# Altium PCB JP_acc.PcbDoc
Units mm, origin at the board's own origin, x right, y up, seen from the top; angles counter-clockwise.
Board outline 27.2 x 23 mm, 2 copper layers (Top Layer, Bottom Layer), stack 1.58 mm thick; 39 components, 26 nets, 160 pads, 19 vias.
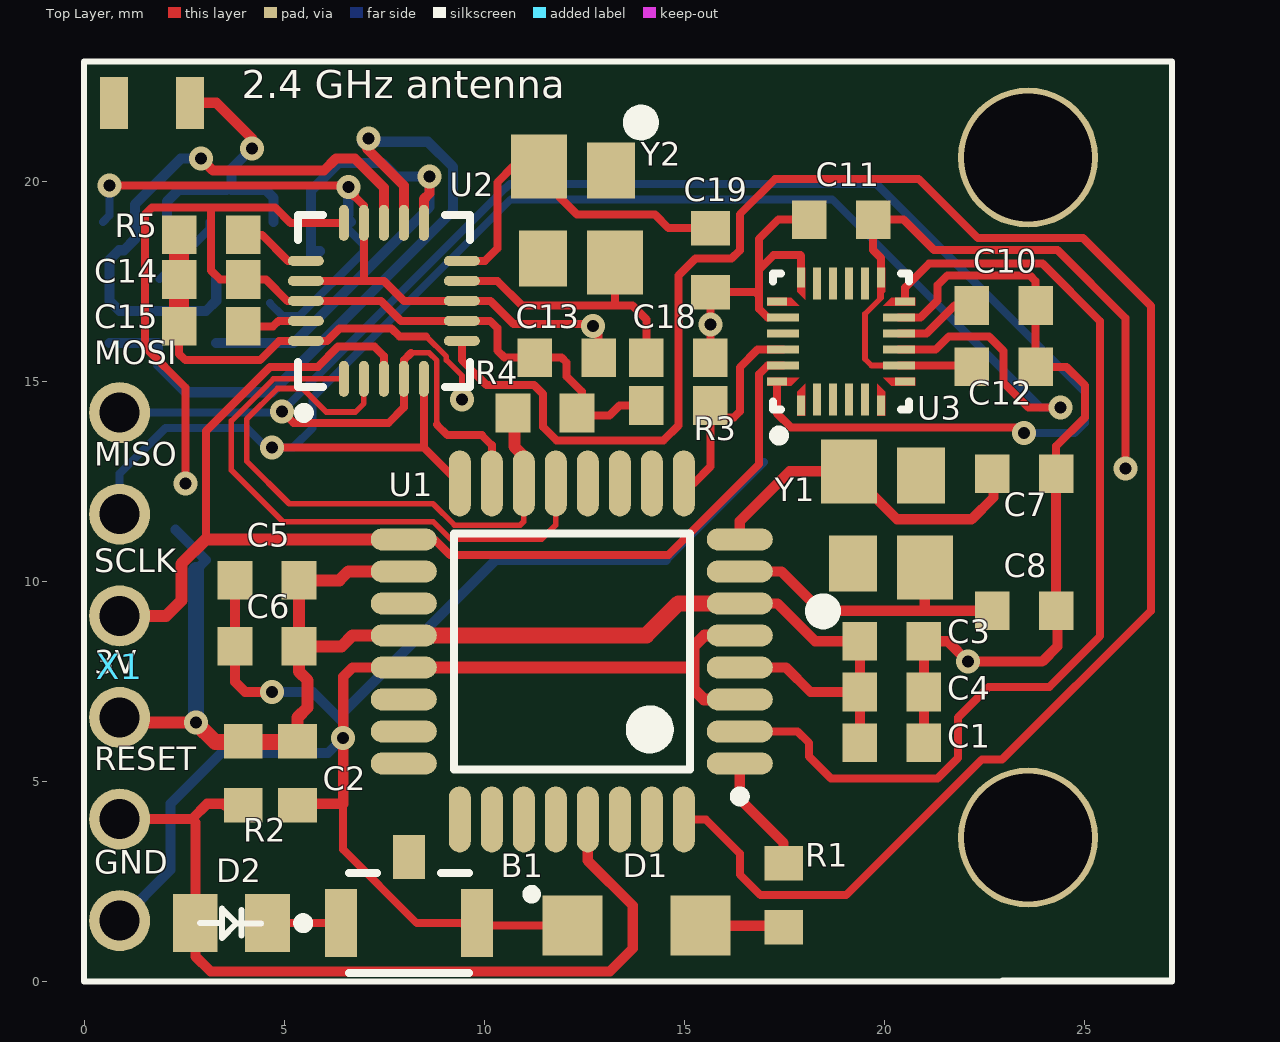
[diagram p0: Top Layer view]
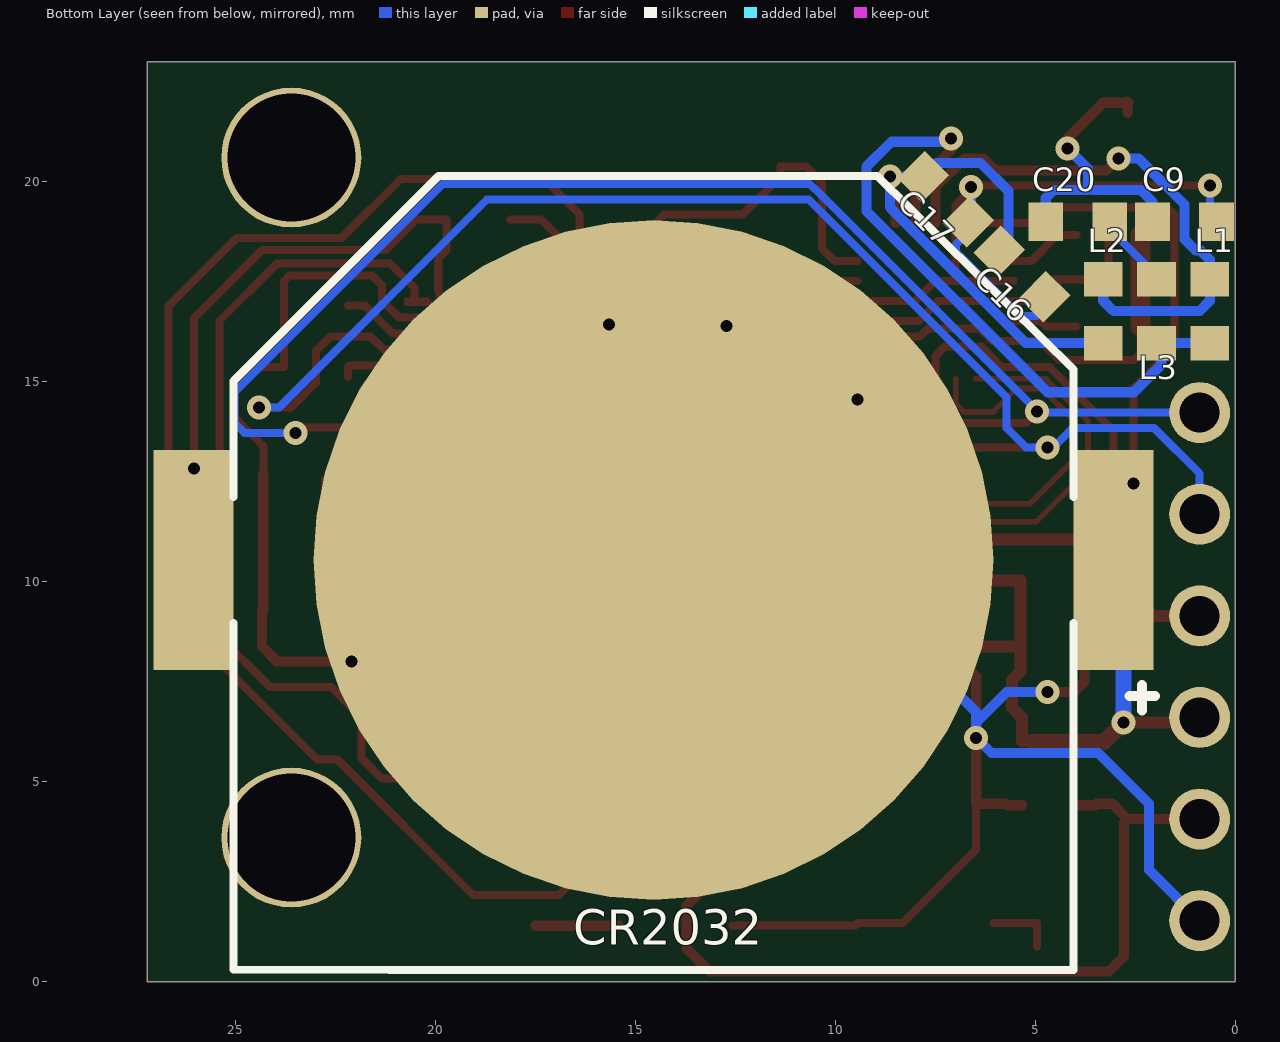
[diagram p1: Bottom Layer view, seen from below]
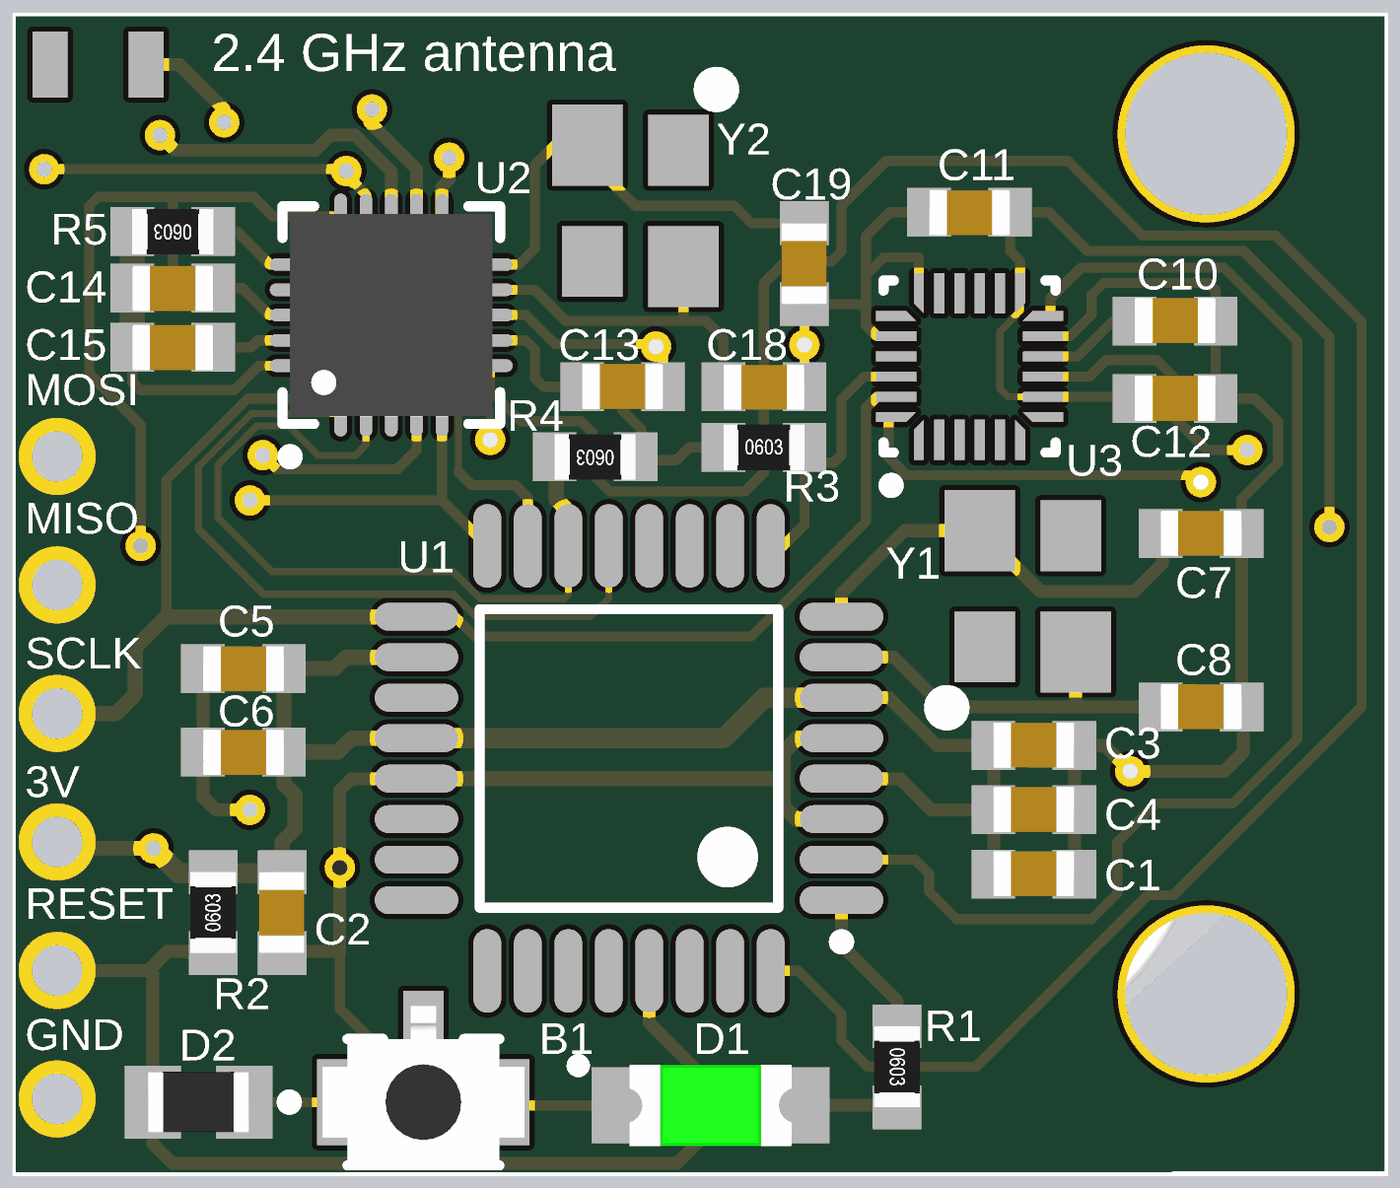
[diagram p2: 3D render of the assembled board from above, using the file's embedded part models]
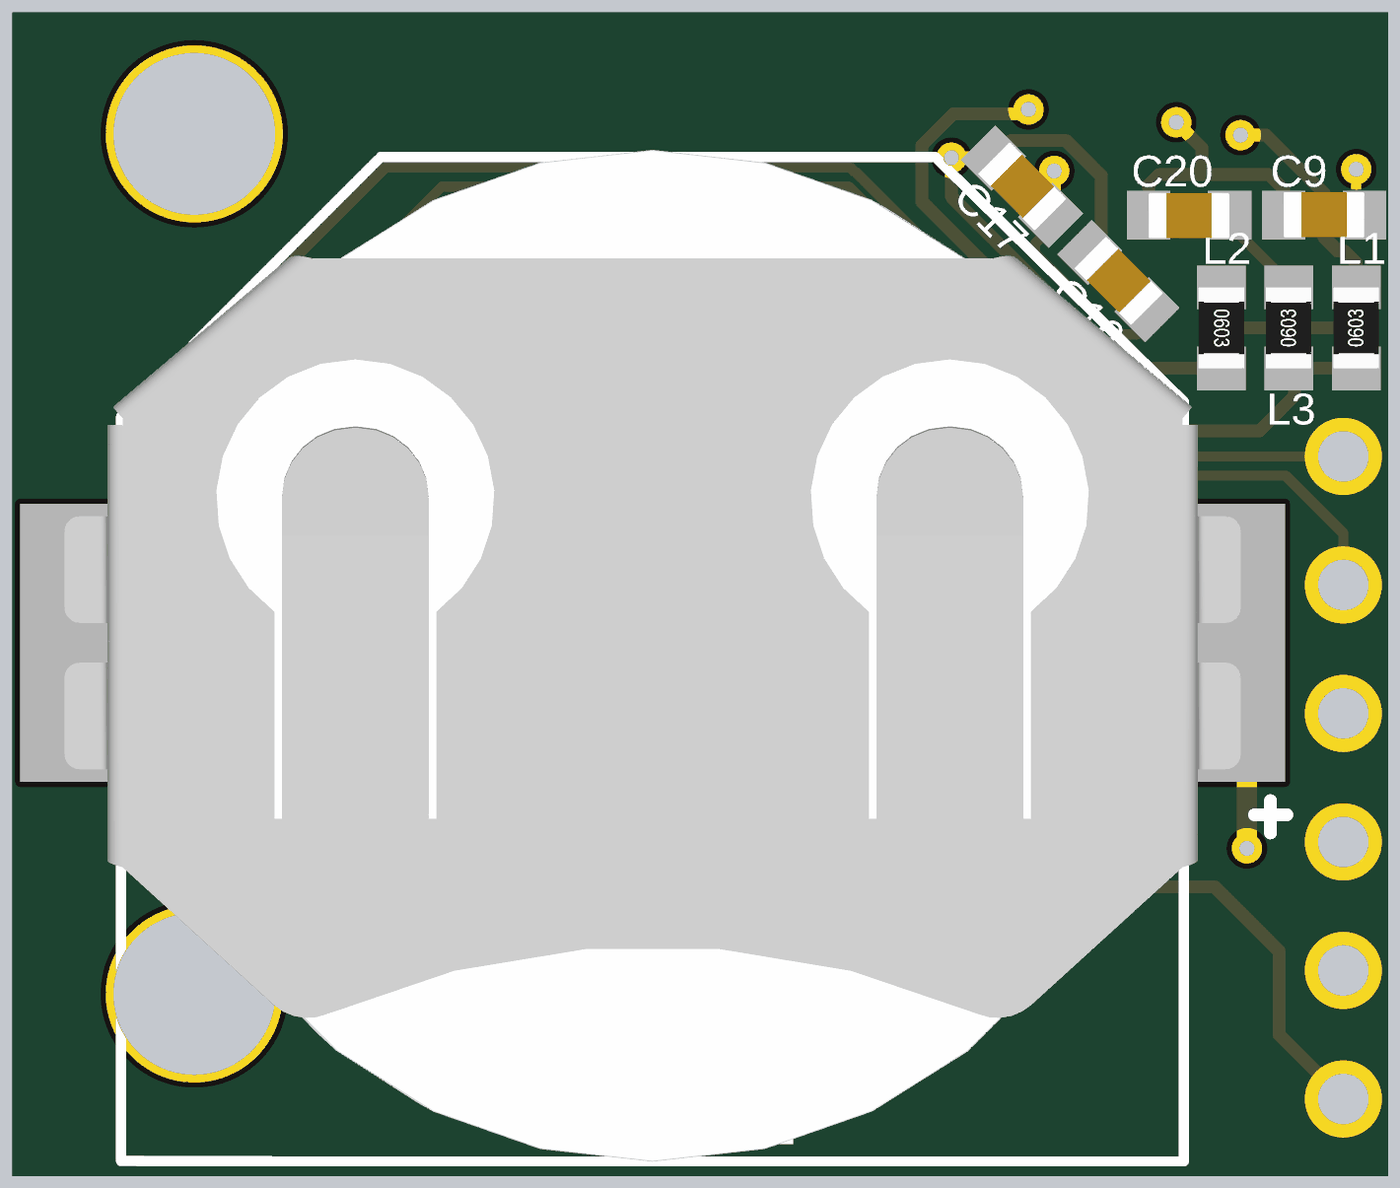
[diagram p3: 3D render of the assembled board from below, using the file's embedded part models]

## Layer stack, top to bottom
Top Solder: solder mask 0.0102, Solder Resist, Dk 3.5
Top Layer: signal copper 0.0356
Dielectric 1: dielectric 1.5086, FR-4, Dk 4.8
Bottom Layer: signal copper 0.0356
Bottom Solder: solder mask 0.0102, Solder Resist, Dk 3.5

## Board outline
0,0 27.2,0 27.2,23 0,23

## Design rules (kind name [scope] priority, off if disabled: settings)
Clearance [All] p1: gap=0.1 ignorepadtopadclearanceinfootprint=TRUE
ComponentClearance [All] p1: gap=0 collisioncheckmode=3 verticalgap=0 showdistances=FALSE
DiffPairsRouting [All] p1: maxlimit=0.254 minlimit=0.1 mostfreqgap=0.254 toplayer_minwidth=0.381 toplayer_maxwidth=0.381 toplayer_prefwidth=0.381 bottomlayer_minwidth=0.381 bottomlayer_maxwidth=0.381 bottomlayer_prefwidth=0.381 maxuncoupledlength=12.7
PolygonConnect [All] p1: connectstyle=Relief reliefconductorwidth=0.254 reliefentries=4 polygonreliefangle="90 Angle" airgapwidth=0.254
RoutingVias [All] p1: holewidth=0.3 width=0.6 viastyle="Through Hole" minholewidth=0.1 minwidth=0.1 maxholewidth=0.711 maxwidth=5
SilkToSilkClearance [All] p1: silktosilkclearance=0.1
SolderMaskExpansion [All] p1: expansion=0.102
Width [All] p1: maxlimit=2 minlimit=0.1 preferedwidth=0.254
27 further rules are at their usual default settings.

## Classes and differential pairs
component class JP_acc: B1 C1 C2 C3 C4 C5 C6 C7 C8 C9 C10 C11 C12 C13 C14 C15 C16 C17 C18 C19 C20 D1 D2 L1 L2 L3 R1 R2 R3 R4 R5 U1 U2 U3 Y1 Y2

## Components (designator, comment, footprint, x,y, rotation, side; value= is the part's Value field where it differs from the comment)
"2.4 GHz antenna" "W3092" Antenna 1.699,21.971 r180 top (schematic designator A1)
B1 "B3U-1100P" "Tactile Switch SMD" 8.128,2.286 r0 top
C1 "10 uF" "0603 cap" 20.193,5.969 r180 top
C2 "100 nF" "0603 cap" 5.334,5.207 r270 top
C3 "1 uF" "0603 cap" 20.193,8.509 r180 top
C4 "1 uF" "0603 cap" 20.193,7.239 r180 top
C5 "4.7 uF 16V" "0603 cap" 4.572,10.033 r0 top
C6 "100 nF" "0603 cap" 4.572,8.382 r0 top
C7 "22 pF" "0603 cap" 23.5,12.7 r180 top
C8 "22 pF" "0603 cap" 23.5,9.271 r180 top
C9 "1 pF" "0603 cap" 1.27,18.992 r0 bottom
C10 "0.1 uF" "0603 cap" 22.987,16.902 r180 top
C11 "0.1 uF" "0603 cap" 18.923,19.05 r0 top
C12 "10 nF" "0603 cap" 22.987,15.367 r180 top
C13 "10 nF" "0603 cap" 12.065,15.6 r180 top
C14 "1 nF" "0603 cap" 3.175,17.552 r0 top
C15 "33 nF" "0603 cap" 3.175,16.383 r0 top
C16 "2.2 nF" "0603 cap" 5.334,17.691 r45 bottom
C17 "4.7 pF" "0603 cap" 7.239,19.558 r45 bottom
C18 "22 pF" "0603 cap" 14.859,15.6 r0 top
C19 "22 pF" "0603 cap" 15.659,18.034 r270 top
C20 "1.5 pF" "0603 cap" 3.937,18.992 r180 bottom
CR2032 "Coin Cell" CR2032 14.542,10.541 r0 bottom (schematic designator B1)
D1 "SML-LX1206GW-TR" "1206 Led" 13.805,1.397 r0 top
D2 "TS4148" "Diode 0808" 3.683,1.461 r180 top
L1 "8.2 nH" "0603 Inductor" 0.635,16.764 r90 bottom
L2 "2.7 nH" "0603 Inductor" 3.301,16.764 r270 bottom
L3 "3.9 nH" "0603 Inductor" 1.968,16.764 r90 bottom
R1 "100 Ω" "0603 res" 17.488,2.159 r270 top
R2 "100 Ω" "0603 res" 3.975,5.207 r90 top
R3 "10 kΩ" "0603 res" 14.859,14.402 r0 top
R4 "10 kΩ" "0603 res" 11.523,14.214 r180 top
R5 "22 kΩ" "0603 res" 3.175,18.669 r180 top
U1 "ATmega328P-AU" TQFP32 12.192,8.255 r180 top
U2 "nRF24L01+" QFN20 7.493,17.018 r90 top
U3 "MPU-6500" QFN24 18.923,16.002 r90 top
X1 "ISP header" 2pins 0.889,6.604 r0 top
Y1 "16 MHz" OSC 20.073,11.557 r90 top
Y2 "16 Mhz" OSC 12.319,19.177 r270 top

## Footprints (in the part's own frame and the unit in brackets; to place one, negate y for a bottom-side part, rotate by r counter-clockwise, add the part's x,y. Pads: shape width x height; smd on the part's side, far side on the other; paste and mask are expansions set on the pad)
2pins [mil]
  round 60 hole 39.37 paste+0 mask+0: 1(0,300) 2(0,200) 3(0,100) 4(0,0) 5(0,-100) 6(0,-200)
"0603 cap" [mil]
  rect 34x38 smd paste+0 mask+0: 1(-31.5,0) 2(31.5,0)
  body extent -31,-18 31,17, height 31
"0603 Inductor" [mil]
  rect 34x38 smd paste+0 mask+0: 1(-31.5,0) 2(31.5,0)
  body extent -31,-18 31,18, height 19
"0603 res" [mil]
  rect 34x38 smd paste+0 mask+0: 1(-31.5,0) 2(31.5,0)
  body extent -31,-18 32,18, height 19
"1206 Led" [mm]
  rect 1.5x1.5 smd paste+0 mask+0: 1(-1.6,0) 2(1.6,0)
  silkscreen extent -2.72,0.68 -2.51,0.89, body extent -1.6,-0.8 1.6,0.8, height 1.1
Antenna [mm] "2x1.2x0.55"
  rect 0.7x1.3 smd: 1(-0.95,0) 2(0.95,0)
CR2032 [mm]
  rect 2x5.5 smd: 1(-11.5,0) 2(11.5,0)
  round 17 smd: 3(0,0)
  silkscreen extent -12.53,-9.6 10.51,10.25, body extent -11.62,-9.74 11.63,10.26, height 3.67
"Diode 0808" [mil]
  rect 44x57 smd paste+0 mask+0: 1(-35.5,0) 2(35.5,0)
  silkscreen extent -29,-14 31,15, body extent -39,-24 39,24, height 18
OSC [mm]
  rect 1.4x1.2 smd: 1(-1.1,0.85) 3(1.1,-0.85)
  rect 1.6x1.4 smd: 2(1.2,0.95) 4(-1.2,-0.95)
  silkscreen extent -2.5,1.4 -2.1,1.8, body extent -1.6,-1.25 1.6,1.25, height 0.85
QFN20 [mm]
  oval 0.9x0.25 smd: 1(-1.95,1) 2(-1.95,0.5) 3(-1.95,0) 4(-1.95,-0.5) 5(-1.95,-1) 11(1.95,-1) 12(1.95,-0.5) 13(1.95,0) 14(1.95,0.5) 15(1.95,1)
  oval 0.25x0.9 smd: 6(-1,-1.95) 7(-0.5,-1.95) 8(0,-1.95) 9(0.5,-1.95) 10(1,-1.95) 16(1,1.95) 17(0.5,1.95) 18(0,1.95) 19(-0.5,1.95) 20(-1,1.95)
  silkscreen extent -2.92,-2.15 2.15,2.15, body extent -2,-2 2,2, height 0.95
QFN24 [mm]
  rect 0.5x0.2 smd: 1(-1.6,1) 6(-1.6,-1) 13(1.6,-1) 18(1.6,1)
  rect 0.8x0.2 smd: 2(-1.45,0.6) 3(-1.45,0.2) 4(-1.45,-0.2) 5(-1.45,-0.6) 14(1.45,-0.6) 15(1.45,-0.2) 16(1.45,0.2) 17(1.45,0.6)
  rect 0.2x0.5 smd: 7(-1,-1.6) 12(1,-1.6) 19(1,1.6) 24(-1,1.6)
  rect 0.2x0.8 smd: 8(-0.6,-1.45) 9(-0.2,-1.45) 10(0.2,-1.45) 11(0.6,-1.45) 20(0.6,1.45) 21(0.2,1.45) 22(-0.2,1.45) 23(-0.6,1.45)
  Top Layer region: 1.1,-1.85 0.9,-1.85 0.9,-1.05 1.1,-1.25 1.1,-1.85
  Top Layer region: -1.85,-1.1 -1.85,-0.9 -1.05,-0.9 -1.25,-1.1 -1.85,-1.1
  Top Layer region: -1.1,1.85 -0.9,1.85 -0.9,1.05 -1.1,1.25 -1.1,1.85
  Top Layer region: 1.85,1.1 1.85,0.9 1.05,0.9 1.25,1.1 1.85,1.1
  Top Layer region: 1.1,1.85 0.9,1.85 0.9,1.05 1.1,1.25 1.1,1.85
  Top Layer region: 1.85,-1.1 1.85,-0.9 1.05,-0.9 1.25,-1.1 1.85,-1.1
  Top Layer region: -1.1,-1.85 -0.9,-1.85 -0.9,-1.05 -1.1,-1.25 -1.1,-1.85
  Top Layer region: -1.85,1.1 -1.85,0.9 -1.05,0.9 -1.25,1.1 -1.85,1.1
  silkscreen extent -2.47,-1.7 1.7,1.7, body extent -1.5,-1.51 1.51,1.51, height 0.98
"Tactile Switch SMD" [mm] "B3U-1100P-B 3pin"
  rect 0.8x1.7 smd: 1(-1.7,-0.825) 2(1.7,-0.825)
  rect 0.8x1.1 smd: 3(0,0.825)
  silkscreen extent -2.77,-2.08 1.5,0.43, body extent -2,-2.07 2,1.08, height 1.6
TQFP32 [mm]
  oval 1.65x0.55 smd: 1(-4.2,2.8) 2(-4.2,2) 3(-4.2,1.2) 4(-4.2,0.4) 5(-4.2,-0.4) 6(-4.2,-1.2) 7(-4.2,-2) 8(-4.2,-2.8) 17(4.2,-2.8) 18(4.2,-2) 19(4.2,-1.2) 20(4.2,-0.4) 21(4.2,0.4) 22(4.2,1.2) 23(4.2,2) 24(4.2,2.8)
  oval 0.55x1.65 smd: 9(-2.8,-4.2) 10(-2,-4.2) 11(-1.2,-4.2) 12(-0.4,-4.2) 13(0.4,-4.2) 14(1.2,-4.2) 15(2,-4.2) 16(2.8,-4.2) 25(2.8,4.2) 26(2,4.2) 27(1.2,4.2) 28(0.4,4.2) 29(-0.4,4.2) 30(-1.2,4.2) 31(-2,4.2) 32(-2.8,4.2)
  silkscreen extent -4.33,-2.95 2.95,3.75, body extent -4.57,-4.6 7.87,4.6, height 1.2

## Part data
"2.4 GHz antenna": library part Antenna
B1: library part Botton, "B3U-1100P series", ComponentLink1Description=Datasheet, ComponentLink1URL=https://omronfs.omron.com/en_US/ecb/products/pdf/en-b3u.pdf
C1 C2 C3 C4 C5 C6 C7 C8 C9 C10 C11 C12 C13 C14 C15 C16 C17 C18 C19 C20: library part Capacitor
D1 D2: library part Diode
L1 L2 L3: library part Inductor
R1 R2 R3 R4 R5: library part Resistor
X1: library part 6pin
Y1 Y2: library part Osc, "16 MHz, 3 x 2.5"

## Free pads (board coordinates)
  round 3.5 hole 3.2: 2(23.6,20.6) 3(23.6,3.6)

## Via types
v1: diameter 0.6, hole 0.3, Top Layer to Bottom Layer, 19 vias

## Nets (pads, with @x,y where several pads share a name; then routed paths per layer and width w, separated by ;. In a path a pad name is that pad's centre, name@x,y a point inside that pad or via, vN(x,y) a via of type N, cw(c..) or ccw(c..) an arc to the next point about the centre after c; other vN are vias at no path point)
"3 V": C1.2 C2.1 C3.2 C4.2 C5.2 C6.2 C11.2 C12.2 C13.2 C14.2 CR2032.1 CR2032.2 R2.2 R3.1 R4.1 U1.4 U1.6 U1.18 U1.20 U2.7 U2.15 U2.18 U3.8 U3.13 X1.4 | length 82.5
  Top Layer w0.14: U3.13 19.923,17.092 19.523,16.692 19.523,15.564 19.685,15.402 U3.8
  Top Layer w0.2: v1(2.54,12.455) 2.54,14.848 1.524,15.864 1.524,19.177 1.699,19.352 3.175,19.352 ; U2.15 5.162,18.968 4.778,19.352 3.175,19.352 ; R4.1 12.372,14.167 R4.1@12.388,14.152 ; R4.1@12.357,14.152 R4.1@12.388,14.152 ; R3.1 13.386,14.402 13.136,14.152 R4.1@12.442,14.152 ; U3.13 19.923,18.088 19.723,18.288 C11.2 20.485,19.05 21.247,18.288 24.333,18.288 26.035,16.586 v1(26.035,12.827) ; U3.8 22.152,15.402 C12.2 C12.2@22.187,15.113 ; 3.175,19.352 3.175,17.78 3.403,17.552 C14.2 4.546,17.552 5.08,17.018 U2.18 7.421,17.018 7.921,16.518 U2.7 10.152,16.518 10.329,16.341 10.329,15.778 10.507,15.6 C13.2 11.938,15.6 12.065,15.473 12.065,15.129 12.442,14.752 R4.1@12.442,14.152 ; R4.1@12.388,14.152 R4.1@12.442,14.152
  Top Layer w0.254: U1.4 17.545,7.855 18.161,7.239 C4.2 C4.2@19.4,7.239 ; U1.6 17.331,9.455 18.277,8.509 C3.2 19.4,8.509 C4.2@19.4,7.239 ; C1.2@19.4,5.969 C4.2@19.4,7.239
  Top Layer w0.3: X1.4 1.016,6.477 v1(2.794,6.477) ; C2.1 5.334,6.604 5.588,6.858 5.588,7.531 5.372,7.747 C6.2 ; U1.20 6.711,8.655 6.438,8.382 C6.2 ; U1.18 6.604,10.255 6.382,10.033 C5.2 C6.2
  Top Layer w0.4: v1(2.794,6.477) 3.285,5.986 R2.2@4.04,5.986 ; R2.2@4.103,5.986 C2.1@5.075,5.986 ; U1.20 14.059,8.655 14.859,9.455 U1.6
  Bottom Layer w0.254: CR2032.1@2.286,11.297 CR2032.1 ; CR2032.1@2.794,10.287 CR2032.1@3.048,10.541
  Bottom Layer w0.4: v1(2.794,6.477) CR2032.1@2.794,10.287
CE: U1.13 U2.1 | length 14.5
  Top Layer w0.14: U2.1 4.733,15.068 3.683,14.018 3.683,12.784 4.967,11.5 8.726,11.5 9.171,11.055 11.436,11.055 11.792,11.411 U1.13
GND: B1.2 C1.1 C2.2 C3.1 C4.1 C5.1 C6.1 C7.1 C8.1 C9.1 C10.1 C11.1 C12.1 C13.1 C14.1 C15.1 C16.1 C17.1 C18.2 C19.2 CR2032.3 D1.1 R5.2 U1.3 U1.5 U1.21 U2.8 U2.14 U2.17 U2.20 U3.11 U3.18 U3.20 X1.6 | length 116
  Top Layer w0.14: 8.552,16.133 9.058,15.627 9.058,15.538 9.447,15.149 v1(9.447,14.552)
  Top Layer w0.2: v1@0.635,19.812 0.727,19.904 6.493,19.904 v1@6.604,19.793 ; C15.1 2.375,15.693 2.533,15.535 4.394,15.535 4.877,16.018 U2.20 6.069,16.018 6.382,16.331 7.684,16.331 7.882,16.133 8.552,16.133 ; U2.17 6.985,17.518 ; 6.477,4.445 6.477,3.302 8.318,1.461 9.447,1.461 9.511,1.397 D1.1 D1.1@12.573,1.397 ; v1@6.743,19.654 6.993,19.404 U2.14 6.993,17.526 6.985,17.518 ; C13.1 12.865,16.256 v1(12.725,16.396) 12.678,16.443 10.735,16.443 10.16,17.018 U2.8 8.001,17.018 7.501,17.518 6.985,17.518 ; C18.2 v1(15.659,16.43) C19.2 16.784,17.234 16.873,17.145 ; U3.20@17.085,16.608 16.873,16.819 16.873,17.145 ; U3.18 17.923,18.145 17.907,18.161 17.235,18.161 16.873,17.799 ; C11.1 17.354,19.05 16.873,18.569 16.873,17.799 ; U3.11 20.909,16.602 21.336,17.029 21.336,17.41 21.579,17.653 23.645,17.653 23.787,17.511 C10.1 C12.1 24.56,15.367 25.019,14.908 25.019,14.103 24.3,13.384 C7.1 ; 16.873,17.145 16.873,17.799
  Top Layer w0.254: C5.1 C6.1 3.772,7.492 4.025,7.239 v1(4.699,7.239) ; C2.2 5.69,4.407 5.728,4.445 6.477,4.445 v1(6.477,6.096) 6.477,7.62 6.712,7.855 U1.21 ; v1(6.604,19.866) 6.604,19.793 v1@6.743,19.654 ; C1.1@21,5.969 21,8.509 21.589,8.509 v1(22.098,8) 23.951,8 24.333,8.382 C8.1@24.333,9.271 ; C8.1 C7.1
  Top Layer w0.3: U1.21 15.231,7.855 15.24,7.845 ; U1.3 15.494,7.055 15.24,7.309 15.24,7.845 ; U1.5 15.513,8.655 15.24,8.382 15.24,7.845
  Top Layer w0.5: C15.1 C14.1 R5.2
  Bottom Layer w0.2: C9.1 0.635,19.157 v1@0.635,19.812 ; C16.1@4.641,16.96 4.964,16.637 5.378,16.637 6.985,18.244 6.985,18.426 C17.1@6.546,18.865 ; CR2032.3@14.548,10.541 CR2032.3@16.998,12.991
  Bottom Layer w0.254: X1.6 2.159,2.794 2.159,4.445 3.429,5.715 6.096,5.715 v1(6.477,6.096) 6.477,6.477 ; v1(4.699,7.239) 5.715,7.239 6.477,6.477 ; v1(6.604,19.866) 6.604,19.177 6.546,19.119 C17.1 ; CR2032.3@14.548,10.541 CR2032.3 10.287,10.541 6.477,6.731 6.477,6.477
  other v1: 0.635,19.9
Int: U1.2 U3.12 | length 25.7
  Top Layer w0.2: U1.2 17.837,6.255 18.123,5.969 18.123,5.626 18.669,5.08 21.336,5.08 21.844,5.588 21.844,6.604 22.606,7.366 24.13,7.366 25.4,8.636 25.4,16.51 23.957,17.953 21.128,17.953 20.523,17.348 U3.12
IRQ: U1.32 U2.6 | length 49.1
  Top Layer w0.2: U2.6 9.443,15.535 10.061,14.917 11.245,14.917 11.469,14.693 11.469,13.87 11.808,13.531 14.484,13.531 14.859,13.906 14.859,17.653 15.283,18.077 16.188,18.077 16.392,18.281 16.392,19.182 17.276,20.066 20.865,20.066 22.343,18.588 24.973,18.588 26.67,16.891 26.67,9.271 22.949,5.55 22.441,5.55 19.05,2.159 16.911,2.159 16.392,2.678 16.392,3.204 15.541,4.055 U1.32
Led: R1.1 U1.1 | length 2.9
  Top Layer w0.254: U1.1 16.392,4.563 17.488,3.467 R1.1
MISO: U1.16 U2.5 U3.9 X1.2 | length 42.2
  Top Layer w0.2: v1(4.699,13.354) 8.493,13.354 ; U2.5@8.493,14.687 8.493,13.354 ; U1.16 8.493,13.354 ; U3.9 21.29,15.802 21.617,16.129 22.622,16.129 22.987,15.764 22.987,14.97 23.606,14.351 v1(24.41,14.351)
  Bottom Layer w0.2: X1.2 0.889,12.7 2.032,13.843 4.064,13.843 4.553,13.354 v1(4.699,13.354) 5.226,13.354 5.715,13.843 5.715,14.605 10.668,19.558 18.703,19.558 23.91,14.351 v1(24.41,14.351)
MOSI: U1.15 U2.4 U3.24 X1.1 | length 48.1
  Top Layer w0.14: 8.176,15.718 8.628,15.718 8.818,15.528 8.818,13.923
  Top Layer w0.2: v1(4.953,14.249) 5.232,13.97 7.614,13.97 7.993,14.349 U2.4 7.993,15.535 8.176,15.718 ; 8.818,13.923 9.082,13.659 9.943,13.659 10.192,13.41 U1.15 ; U3.24 17.323,14.205 17.677,13.851 23.36,13.851 v1(23.495,13.716)
  Bottom Layer w0.2: X1.1 5.08,14.224 5.055,14.249 v1(4.953,14.249) 4.953,14.267 10.544,19.858 10.562,19.858 10.643,19.939 19.812,19.939 25.019,14.732 25.019,13.97 24.765,13.716 v1(23.495,13.716)
nCS: R3.2 U1.9 U3.22 | length 5.4
  Top Layer w0.2: U1.9 15.239,12.455 15.659,12.875 R3.2 ; R3.2@15.745,14.1 16.243,14.1 16.392,14.249 16.392,15.356 16.838,15.802 U3.22
nCS2: R4.2 U1.14 U2.2 | length 15.6
  Top Layer w0.14: U2.2 6.993,14.452 6.781,14.24 6.054,14.24 5.466,14.828 4.833,14.828 4.064,14.059 4.064,13.011 5.128,11.947 8.721,11.947 9.257,11.411 10.903,11.411 10.992,11.5 U1.14
  Top Layer w0.3: R4.2@10.757,14.152 10.757,13.373 10.992,13.138 U1.14
NetA1_1: "2.4 GHz antenna.1" C9.2 C20.1 | length 7.6
  Top Layer w0.254: 2.698,21.717 2.698,21.971 ; v1(4.191,20.828) 4.191,21.082 3.302,21.971 2.698,21.971 ; 2.698,21.971 2.667,21.971 2.698,22.002 2.698,21.971
  Bottom Layer w0.254: C9.2 2.07,19.5 2.363,19.793 3.556,19.793 ; v1(4.191,20.828) 3.683,20.32 3.683,19.793 4.533,19.793 4.737,19.589 C20.1
NetB1_1: B1.1 D2.1 | length 1.7
  Top Layer w0.2: D2.1@4.953,0.876 4.953,1.461 B1.1@6.047,1.461
NetC7_2: C7.2 U1.8 Y1.2 | length 8.7
  Top Layer w0.254: U1.8 16.392,11.511 17.638,12.757 Y1.2 20.323,11.557 22.187,11.557 22.733,12.103 22.733,12.535 C7.2@22.568,12.7
NetC8_2: C8.2 U1.7 Y1.4 | length 7.7
  Top Layer w0.254: U1.7 17.431,10.255 18.415,9.271 21.016,9.271 ; Y1.4@21.016,10.23 21.016,9.271 ; C8.2@22.733,9.271 21.016,9.271
NetC10_2: C10.2 U3.10 | length 2.1
  Top Layer w0.2: U3.10 21.063,16.202 21.763,16.902 C10.2
NetC15_2: C15.2 U2.19 | length 1.6
  Top Layer w0.2: C15.2 4.724,16.383 4.859,16.518 U2.19
NetC18_1: C18.1 U2.9 Y2.2 | length 7.1
  Top Layer w0.2: U2.9 10.329,17.518 10.945,16.902 13.208,16.902 ; Y2.2@13.269,18 13.269,16.963 13.208,16.902 ; C18.1 14.059,16.556 13.713,16.902 13.208,16.902
NetC19_1: C19.1 U2.10 Y2.4 | length 8.5
  Top Layer w0.2: U2.10 10.017,18.018 10.329,18.33 10.329,19.981 10.725,20.377 Y2.4 11.369,20.127 12.319,19.177 14.269,19.177 14.612,18.834 C19.1@15.231,18.834
NetC20_2: C20.2 L3.2 | length 1.9
  Bottom Layer w0.2: L3.2@1.889,17.564 3.137,18.812 C20.2
NetD1_2: D1.2 R1.2 | length 2.1
  Top Layer w0.254: D1.2 R1.2@17.488,1.397
NetL1_1: L1.1 L3.1 U2.12 | length 17.7
  Top Layer w0.254: v1(7.112,21.082) 7.112,20.871 7.069,20.828 7.993,19.904 U2.12
  Bottom Layer w0.254: L1.1 1.851,15.964 1.851,15.421 2.54,14.732 4.691,14.732 9.223,19.264 9.223,20.368 8.594,20.997 6.95,20.997 6.993,20.955 7.112,21.074 v1(7.112,21.082)
NetL1_2: L1.2 L2.1 U2.13 | length 14.3
  Top Layer w0.254: v1(2.921,20.574) 3.218,20.277 5.996,20.277 6.293,20.574 6.772,20.574 7.493,19.853 U2.13
  Bottom Layer w0.254: v1(2.921,20.574) 2.416,20.574 1.27,19.428 1.27,18.557 0.996,18.283 0.872,18.283 0.635,18.045 L1.2 0.635,17.018 0.889,16.764 3.048,16.764 3.302,17.018 L2.1
NetR5_1: R5.1 U2.16 | length 1.8
  Top Layer w0.2: R5.1 4.445,18.669 5.096,18.018 U2.16
Reset: D2.2 R2.1 U1.29 X1.5 | length 21.6
  Top Layer w0.254: X1.5 2.698,4.064 3.079,4.445 3.473,4.445 3.511,4.407 R2.1 ; 2.781,3.981 D2.2 2.781,0.635 3.162,0.254 13.142,0.254 13.716,0.828 13.716,1.901 12.592,3.025 U1.29
SCLK: U1.17 U2.3 U3.23 X1.3 | length 30
  Top Layer w0.2: 3.048,11.061 3.048,13.765 4.65,15.367 5.842,15.367 6.35,15.875 7.255,15.875 7.493,15.637 U2.3 ; U1.17 8.757,11.055 9.144,10.668 14.605,10.668 16.873,12.936 16.873,15.185 17.09,15.402 U3.23
  Top Layer w0.3: X1.3 2.05,9.144 2.431,9.525 2.431,10.444 3.048,11.061 ; 3.048,11.055 U1.17
Tuljave: C16.2 C17.2 L2.2 U2.11 | length 14.1
  Top Layer w0.254: U2.11 8.493,19.558 8.636,19.701 v1(8.636,20.127)
  Bottom Layer w0.254: L2.2 5.239,15.964 8.636,19.361 v1(8.636,20.127) 7.808,20.127 C17.2 7.463,20.466 6.369,20.466 5.673,19.77 C16.2@5.673,18.257 ; C16.2@5.773,18.092 5.673,18.092 C16.2@5.673,18.257 ; C16.2 C16.2@5.673,18.257
pads on no net: "2.4 GHz antenna.2" B1.3 U1.10 U1.11 U1.12 U1.19 U1.22 U1.23 U1.24 U1.25 U1.26 U1.27 U1.28 U1.30 U1.31 U3.1 U3.2 U3.3 U3.4 U3.5 U3.6 U3.7 U3.14 U3.15 U3.16 U3.17 U3.19 U3.21 Y1.1 Y1.3 Y2.1 Y2.3

## Silkscreen, mask and mechanical layers (free items; w line width, h text height)
Top Overlay:
  lines w0.15: 22.965,0.022 27.178,0.022 27.2,0 ; 27.2,0 27.2,23 0,23 0,0 27.2,0
  text "MOSI" at 0.254,15.24 h1
  text "MISO" at 0.254,12.7 h1
  text "SCLK" at 0.254,10.033 h1
  text "3V" at 0.254,7.493 h1
  text "RESET" at 0.254,5.08 h1
  text "GND" at 0.254,2.495 h1